# Altium PCB IFE_PDB_2019.PcbDoc
Units mm, origin at the board's own origin, x right, y up, seen from the top; angles counter-clockwise.
Board outline 100 x 50 mm, 2 copper layers (Top Layer, Bottom Layer); 23 components, 17 nets, 99 pads, 79 vias.
Unrouted connection lines stored in the file: 1.
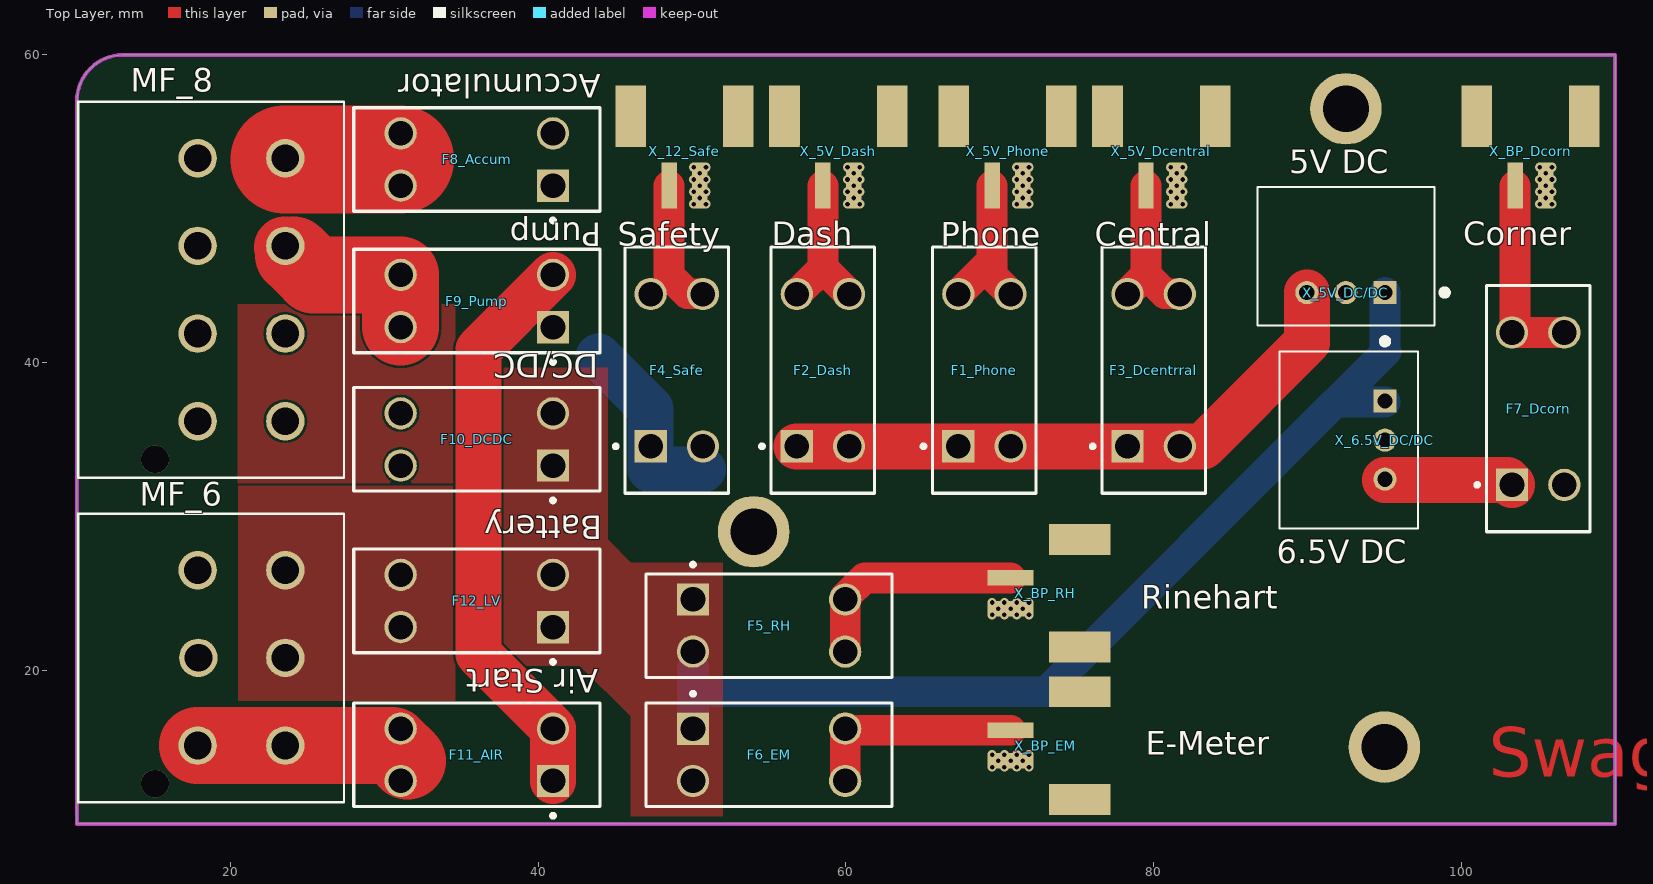
[diagram p0: Top Layer view]
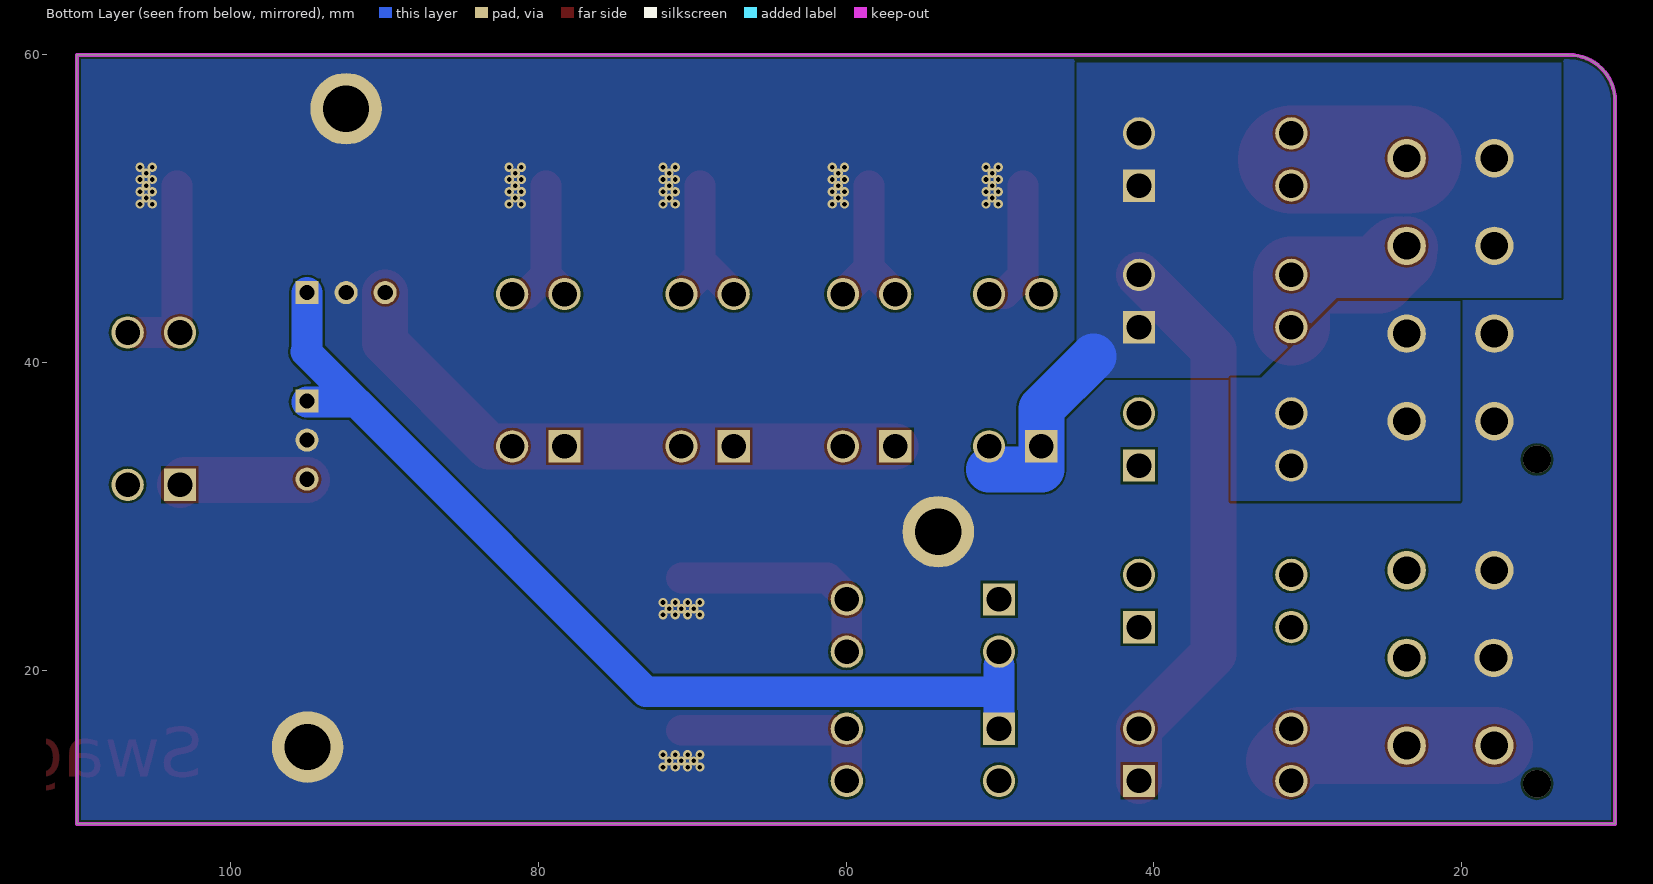
[diagram p1: Bottom Layer view, seen from below]
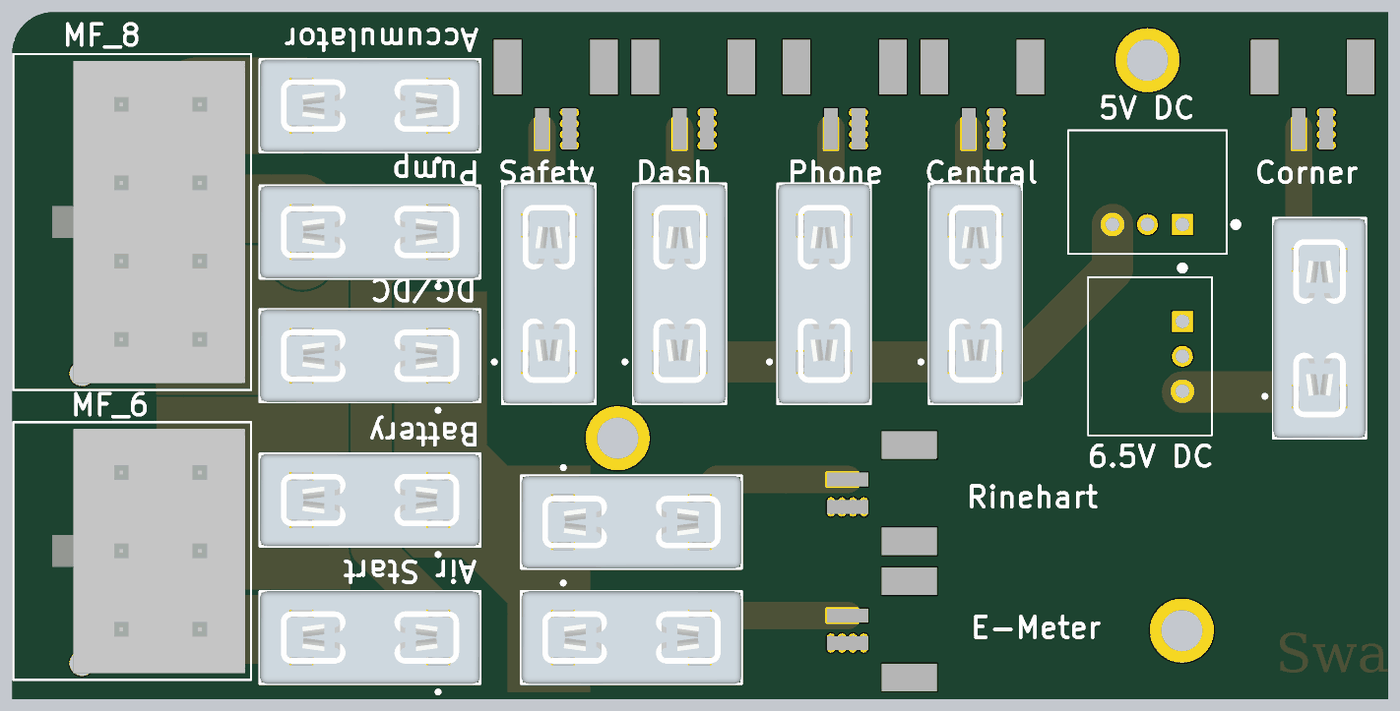
[diagram p2: 3D render of the assembled board from above, using the file's embedded part models]

## Layer stack, top to bottom
Top Solder: solder mask 0.0102, Solder Resist, Dk 3.5
Top Layer: signal copper 0.0356
Dielectric 1: dielectric 0.32, FR-4, Dk 4.8
Bottom Layer: signal copper 0.0356
Bottom Solder: solder mask 0.0102, Solder Resist, Dk 3.5

## Board outline
10,10 10,57 cw(c13,57) 13,60 110,60 110,10

## Design rules (kind name [scope] priority, off if disabled: settings)
Clearance [All] p1: gap=0.152 ignorepadtopadclearanceinfootprint=FALSE
ComponentClearance [All] p1: gap=0.254 collisioncheckmode=3 verticalgap=0 showdistances=FALSE
PolygonConnect [All] p1: connectstyle=Direct reliefconductorwidth=0.254 reliefentries=4 polygonreliefangle="90 Angle" airgapwidth=0.254
RoutingVias [All] p1: holewidth=0.44 width=0.6 viastyle="Through Hole" minholewidth=0.3 minwidth=0.6 maxholewidth=1 maxwidth=1.27
SolderMaskExpansion [All] p1: expansion=0.102
Width [All] p1: maxlimit=20.32 minlimit=0.152 preferedwidth=0.406
29 further rules are at their usual default settings.

## Components (designator, comment, footprint, x,y, rotation, side; value= is the part's Value field where it differs from the comment)
F1_Phone "Phone" KSTN-3568_V 69,39.5 r90 top
F2_Dash "Dash" KSTN-3568_V 58.5,39.5 r90 top
F3_Dcentrral "Daqa Central" KSTN-3568_V 80,39.5 r90 top
F4_Safe "Safety" KSTN-3568_V 49,39.5 r90 top
F5_RH "Rinehart" KSTN-3568_V 55,22.9 r0 top
F6_EM "" KSTN-3568_V 55,14.5 r0 top
F7_Dcorn "Daqa Corner" KSTN-3568_V 105,37 r90 top
F8_Accum "Accumulator" KSTN-3568_V 36,53.2 r180 top
F9_Pump "Pump" KSTN-3568_V 36,44 r180 top
F10_DCDC "DC/DC" KSTN-3568_V 36,35 r180 top
F11_AIR "Air Start" KSTN-3568_V 36,14.5 r180 top
F12_LV "Battery" KSTN-3568_V 36,24.5 r180 top
MF_6 "" 172065-0306 20.7,20.8 r90 top
MF_8 "" 172065-0308 20.7,44.734 r90 top
X_5V_Dash "Dash" 505575-02 59.5,52 r0 top
X_5V_DC/DC "5V DC" *CONV_V7805-2000 92.5,46.9 r180 top
X_5V_Dcentral "Central" 505575-02 80.5,52 r0 top (schematic designator X_5V_DAQcentral)
X_5V_Phone "Phone" 505575-02 70.5,52 r0 top
X_6.5V_DC/DC "6.5V DC" *CONV_V7805-2000 92.69,34.96 r270 top
X_12_Safe "Safety" 505575-02 49.5,52 r0 top (schematic designator X_12_Safety)
X_BP_Dcorn "Corner" 505575-02 104.5,52 r0 top (schematic designator X_BP_DAQcorn)
X_BP_EM "E-Meter" 505575-02 71.2,15.1 r270 top
X_BP_RH "Rinehart" 505575-02 71.2,25 r270 top (schematic designator X_BP_RINEH)

## Footprints (in the part's own frame and the unit in brackets; to place one, negate y for a bottom-side part, rotate by r counter-clockwise, add the part's x,y. Pads: shape width x height; smd on the part's side, far side on the other; paste and mask are expansions set on the pad)
172065-0306 [mm]
  round 2.5 hole 1.8: 1(5.7,-2.85) 2(0,-2.85) 3(-5.7,-2.85) 4(5.7,2.85) 5(0,2.8) 6(-5.7,2.85)
  silkscreen extent -9.38,-6.66 9.38,10.62, body extent -8.87,-6.24 8.88,7.79, height 15.6
172065-0308 [mm]
  round 2.5 hole 1.8: 1(8.55,-2.85) 2(2.85,-2.85) 3(-2.85,-2.85) 4(-8.55,-2.85) 5(8.55,2.85) 6(2.85,2.85) 7(-2.85,2.85) 8(-8.55,2.85)
  silkscreen extent -12.22,-6.66 12.22,10.62, body extent -11.72,-6.24 11.73,7.79, height 15.6
505575-02 [mm]
  rect 1x3 smd: 1(-1,-0.5) 2(1,-0.5)
  rect 2x4 smd: P$3(-3.5,4) P$4(3.5,4)
*CONV_V7805-2000 [mm]
  rect 1.508x1.508 hole 1: 1(-2.54,2.35)
  round 1.508 hole 1: 2(0,2.35) 3(2.54,2.35)
  silkscreen extent -6.62,-4.5 5.75,4.5
KSTN-3568_V [mm] "THD, 4-Leads, Body 16x6.73mm, Pitch 9.9mm"
  rect 2.1x2.1 hole 1.6: 1(-4.95,1.7)
  round 2.1 hole 1.6: 2(-4.95,-1.7) 3(4.95,1.7) 4(4.95,-1.7)
  silkscreen extent -8,-3.36 8,4.09, body extent -8,-3.37 8,3.37, height 7.44

## Part data
F1_Phone F2_Dash F3_Dcentrral F4_Safe F5_RH F6_EM F7_Dcorn F8_Accum F9_Pump F10_DCDC F11_AIR F12_LV: library part CMP-2000-05464-1, "Fuse Holder, 20 A, 500 V, -50 to 145 degC, 4-Pin THD, RoHS", Manufacturer=Keystone, Package Description="4-Pin Through Hole Device, Body 16 x 6.73 mm, Pitch 9.9 mm", Package Reference=3568, Datasheet URL=https://datasheet.ciiva.com/16294/m60-2p40-16294706.pdf, Datasheet Version=04/2013, Manufacturer URL=http://www.keyelco.com/, Mounting Technology=ThroughHole
MF_6: library part POS6_MgF172065-0306, "Conn Power HDR 6 POS 5.7mm Solder ST Thru-Hole 6 Terminal 1 Port Mega-Fit® Frame : POS6_MgF172065-0306", Manufacturer=Molex, Manufacturer Part Number=172065-0306, ComponentLink1Description=http://datasheet.octopart.com/172065-0306-Molex-datasheet-101610458.pdf?src-supplier=Farnell, ComponentLink1URL=http://datasheet.octopart.com/172065-0306-Molex-datasheet-101610458.pdf?src-supplier=Farnell, ComponentLink2Description=http://datasheet.octopart.com/172065-0306-Molex-datasheet-96710945.pdf?src-supplier=Farnell, ComponentLink2URL=http://datasheet.octopart.com/172065-0306-Molex-datasheet-96710945.pdf?src-supplier=Farnell, Pricing 1="1 = 7.66000, 89 = 6.38225, 178 = 6.06309, 534 = 5.10577, 1068 = 4.46754 (USD)", Stock 1=426, Supplier 1=Digikey
MF_8: library part POS8_MgF172065-0308, "Conn Power HDR 8 POS 5.7mm Solder ST Thru-Hole 8 Terminal 1 Port Mega-Fit® Frame", Manufacturer=Molex, Manufacturer Part Number=172065-0308, ComponentLink1Description=http://datasheet.octopart.com/172065-0308-Molex-datasheet-101610459.pdf?src-supplier=Farnell, ComponentLink1URL=http://datasheet.octopart.com/172065-0308-Molex-datasheet-101610459.pdf?src-supplier=Farnell, ComponentLink2Description=http://datasheet.octopart.com/172065-0308-Molex-datasheet-96710946.pdf?src-supplier=Farnell, ComponentLink2URL=http://datasheet.octopart.com/172065-0308-Molex-datasheet-96710946.pdf?src-supplier=Farnell, Pricing 1="1 = 9.17000, 68 = 7.57265, 136 = 7.37338, 544 = 6.17768, 1020 = 5.46027 (USD)", Stock 1=323, Supplier 1=Digikey
X_5V_Dash X_5V_Dcentral X_12_Safe X_BP_Dcorn X_BP_EM X_BP_RH: library part 505575-02, "Molex 505575-02 2 Position 2.00mm pitch connector wire to board connector Datasheet", DeviceSetName=505575-02, GateName_1=G$1, LibraryName="MOLEX Micro-Lock", Package=505575-02, SymbolName_1=2POS
X_5V_DC/DC: library part V7805-2000, "V78-2000 Series 13 W Single Output 12V Straight Non Isolated Switching Regulator", Package="SIP-3 CUI", CUI_purchase_URL=https://www.cui.com/product/power/dc-dc-converters/non-isolated/2-a-output-current/v78-2000-series?utm_source=snapeda.com&utm_medium=referral&utm_campaign=snapedaBOM, Digi-Key_Part_Number=102-2175-ND, Digi-Key_Purchase_URL=https://www.digikey.com/product-detail/en/cui-inc/V7805-2000/102-2175-ND/2352134?utm_source=snapeda&utm_medium=aggregator&utm_campaign=symbol, MF="CUI Inc.", MP=V7805-2000, SnapEDA_Link=https://www.snapeda.com/parts/V7805-2000/CUI%20Inc./view-part/?ref=snap
X_5V_Phone: library part 505575-02, DeviceSetName=505575-02, GateName_1=G$1, LibraryName="MOLEX Micro-Lock", Package=505575-02, SymbolName_1=2POS
X_6.5V_DC/DC: library part V7805-2000, "Male Header, Pitch 2.54 mm, 1 x 3 Position, Height 8.38 mm, Tail Length 3.18 mm, RoHS, Bulk", Package="SIP-3 CUI", CUI_purchase_URL=https://www.cui.com/product/power/dc-dc-converters/non-isolated/2-a-output-current/v78-2000-series?utm_source=snapeda.com&utm_medium=referral&utm_campaign=snapedaBOM, Digi-Key_Part_Number=102-2175-ND, Digi-Key_Purchase_URL=https://www.digikey.com/product-detail/en/cui-inc/V7805-2000/102-2175-ND/2352134?utm_source=snapeda&utm_medium=aggregator&utm_campaign=symbol, MF="CUI Inc.", MP=V7805-2000, SnapEDA_Link=https://www.snapeda.com/parts/V7805-2000/CUI%20Inc./view-part/?ref=snap

## Free pads (board coordinates)
  round 4.65 hole 3: 10(54,29) 10(95,15) 11(92.5,56.5)

## Via types
v1: diameter 0.6, hole 0.3, Top Layer to Bottom Layer, 77 vias
v2: diameter 1.8, hole 1.8, Top Layer to Bottom Layer, 2 vias

## Nets (pads, with @x,y where several pads share a name; then routed paths per layer and width w, separated by ;. In a path a pad name is that pad's centre, name@x,y a point inside that pad or via, vN(x,y) a via of type N, cw(c..) or ccw(c..) an arc to the next point about the centre after c; other vN are vias at no path point)
12V: F4_Safe.1 F4_Safe.2 F8_Accum.1 F8_Accum.2 F9_Pump.1 F9_Pump.2 F11_AIR.1 F11_AIR.2 MF_8.5 MF_8.6 | length 49.1
  Top Layer w3: F11_AIR.1 F11_AIR.2 36.1,21.05 36.1,40.85 F9_Pump.2
  Bottom Layer w3: 43.9,40.4 47.3,37 47.3,33.05 50.7,33.05
BP: F5_RH.1 F5_RH.2 F6_EM.1 F6_EM.2 F10_DCDC.1 F10_DCDC.2 F12_LV.1 F12_LV.2 X_5V_DC/DC.1 X_6.5V_DC/DC.1 | length 65.4
  Bottom Layer w2: F6_EM.1 50.05,18.6 ; F5_RH.2@50.05,20.3 50.05,18.6 ; X_5V_DC/DC.1 95.04,40.7 95.1,40.7 91.84,37.44 ; X_6.5V_DC/DC.1@95.05,37.44 91.84,37.44 ; 50.05,18.6 73,18.6 91.8,37.4 91.84,37.44
GND: MF_6.4 MF_6.5 MF_8.7 MF_8.8 pad.10 pad.11 X_5V_Dash.2 X_5V_DC/DC.2 X_5V_Dcentral.2 X_5V_Phone.2 X_6.5V_DC/DC.2 X_12_Safe.2 X_BP_Dcorn.2 X_BP_EM.2 X_BP_RH.2
  other v1: 69.5,13.7 70.3,13.7 71.1,13.7 71.9,13.7 69.9,14.1 70.7,14.1 71.5,14.1 69.5,14.5 70.3,14.5 71.1,14.5 71.9,14.5 69.5,23.6 70.3,23.6 71.1,23.6 71.9,23.6 69.9,24 70.7,24 71.5,24 69.5,24.4 70.3,24.4 71.1,24.4 71.9,24.4 50.1,50.3 50.9,50.3 60.1,50.3 60.9,50.3 71.1,50.3 71.9,50.3 81.1,50.3 81.9,50.3 105.1,50.3 105.9,50.3 50.5,50.7 60.5,50.7 71.5,50.7 81.5,50.7 105.5,50.7 50.1,51.1 50.9,51.1 60.1,51.1 60.9,51.1 71.1,51.1 71.9,51.1 81.1,51.1 81.9,51.1 105.1,51.1 105.9,51.1 50.5,51.5 60.5,51.5 71.5,51.5 81.5,51.5 105.5,51.5 50.1,51.9 50.9,51.9 60.1,51.9 60.9,51.9 71.1,51.9 71.9,51.9 81.1,51.9 81.9,51.9 105.1,51.9 105.9,51.9 50.5,52.3 60.5,52.3 71.5,52.3 81.5,52.3 105.5,52.3 50.1,52.7 50.9,52.7 60.1,52.7 60.9,52.7 71.1,52.7 71.9,52.7 81.1,52.7 81.9,52.7 105.1,52.7 105.9,52.7
NetF1_Phone_1: F1_Phone.1 F1_Phone.2 F2_Dash.1 F2_Dash.2 F3_Dcentrral.1 F3_Dcentrral.2 X_5V_DC/DC.3 | length 39.2
  Top Layer w3: F2_Dash.1 F1_Phone.1 F1_Phone.2 F3_Dcentrral.1 F3_Dcentrral.2 83.2,34.55 89.96,41.31 X_5V_DC/DC.3
NetF1_Phone_3: F1_Phone.3 F1_Phone.4 X_5V_Phone.1 | length 10.7
  Top Layer w2: F1_Phone.3 69.5,46.65 ; X_5V_Phone.1 69.5,46.65 ; F1_Phone.4 70.7,44.471 69.5,45.672 69.5,46.65
NetF2_Dash_3: F2_Dash.3 F2_Dash.4 X_5V_Dash.1 | length 10.2
  Top Layer w2: F2_Dash.3 58.5,46.15 ; X_5V_Dash.1 58.5,46.15 ; F2_Dash.4 58.5,46.15
NetF3_Dcentrral_3: F3_Dcentrral.3 F3_Dcentrral.4 X_5V_Dcentral.1 | length 10.3
  Top Layer w2: F3_Dcentrral.3 78.3,44.477 78.35,44.527 78.35,44.55 79.5,45.7 ; X_5V_Dcentral.1 79.5,45.7 ; F3_Dcentrral.4 81.681,44.469 80.731,44.469 79.5,45.7
NetF4_Safe_3: F4_Safe.3 F4_Safe.4 X_12_Safe.1 | length 8.5
  Top Layer w2: X_12_Safe.1 48.5,45.672 49.703,44.469 50.681,44.469 F4_Safe.4
NetF5_RH_3: F5_RH.3 F5_RH.4 X_BP_RH.1 | length 14.8
  Top Layer w2: F5_RH.4 F5_RH.3 59.95,24.75 61.2,26 X_BP_RH.1
NetF6_EM_3: F6_EM.3 F6_EM.4 X_BP_EM.1 | length 14.2
  Top Layer w2: F6_EM.4 F6_EM.3 59.977,16.2 60.077,16.1 X_BP_EM.1
NetF7_Dcorn_1: F7_Dcorn.1 F7_Dcorn.2 X_6.5V_DC/DC.3 | length 8.4
  Top Layer w3: X_6.5V_DC/DC.3@95.05,32.36 102.99,32.36 F7_Dcorn.1
NetF7_Dcorn_3: F7_Dcorn.3 F7_Dcorn.4 X_BP_Dcorn.1 | length 13
  Top Layer w2: X_BP_Dcorn.1 103.5,42.177 103.3,41.977 F7_Dcorn.3 F7_Dcorn.4
NetF8_Accum_3: F8_Accum.3 F8_Accum.4 MF_8.1 | length 7.5
  Top Layer w7: MF_8.1@23.5,53.2 31,53.2
NetF9_Pump_3: F9_Pump.3 F9_Pump.4 MF_8.2 | length 11.7
  Top Layer w4: MF_8.2@23.5,47.5 24,47 MF_8.2@24.092,47
  Top Layer w5: MF_8.2@24.092,47 25.392,45.7 F9_Pump.4 F9_Pump.3
NetF10_DCDC_3: F10_DCDC.3 F10_DCDC.4 MF_8.3 MF_8.4
NetF11_AIR_3: F11_AIR.3 F11_AIR.4 MF_6.3 MF_6.6 | length 14.1
  Top Layer w5: MF_6.6 MF_6.3 30.5,15.1 31.5,14.1
NetF12_LV_3: F12_LV.3 F12_LV.4 MF_6.1 MF_6.2
pads on no net: X_5V_Dash.P$3 X_5V_Dash.P$4 X_5V_Dcentral.P$3 X_5V_Dcentral.P$4 X_5V_Phone.P$3 X_5V_Phone.P$4 X_12_Safe.P$3 X_12_Safe.P$4 X_BP_Dcorn.P$3 X_BP_Dcorn.P$4 X_BP_EM.P$3 X_BP_EM.P$4 X_BP_RH.P$3 X_BP_RH.P$4
copper on no net:
  other v2: 15.08,12.62 15.08,33.704

## Polygon pours and split planes (outlines as drawn)
GND on Bottom Layer "Bottom Layer-GND" (solid, pour order 22): 10.25,60 10.25,10.25 110.25,10.25 110.25,11 110.25,60 10.5,60
12V on Bottom Layer "Bottom Layer-12V" (solid, pour order 20): 13.5,59.5 45,59.5 45,39 33.3,39 28.1,44.2 13.5,44.2
NetF10_DCDC_3 on Bottom Layer "Bottom Layer-NetF10_DCDC_3" (solid, pour order 10): 20.083,44 28,44 33,39 35,39 35,31 20.083,31
no net on Bottom Layer "Bottom Layer-No Net" (solid, pour order 6): 93.25,3
BP on Top Layer "Top Layer-No Net" (solid, pour order 18): 37.6,39.672 44.5,39.672 44.5,28.5 46,27 52,27 52,10.5 46,10.5 46,17 42.7,20.3 37.6,20.3
no net on Top Layer "Top Layer-No Net 1" (solid, pour order 14): 34.6,43.8 34.6,32.1 20.45,32.1 20.45,43.8
NetF12_LV_3 on Top Layer "Top Layer-NetF12_LV_3" (solid, pour order 12): 34.6,32 34.6,18 20.5,18 20.5,32
no net on Top Layer "Top Layer-No Net 2" (solid, pour order 8): 21.5,30

## Keep-outs
Keep-Out Layer:
  the board outline again, w0.254

## Other copper
Top Layer:
  text "Swag" at 101.8,12 h5.52

## Silkscreen, mask and mechanical layers (free items; w line width, h text height)
Mechanical 22:
  lines w0.254: 106.05,79.25 ccw(c106.05,79.5) 106.3,79.5